# EAGLE board separation (EAGLE 9.6.2)
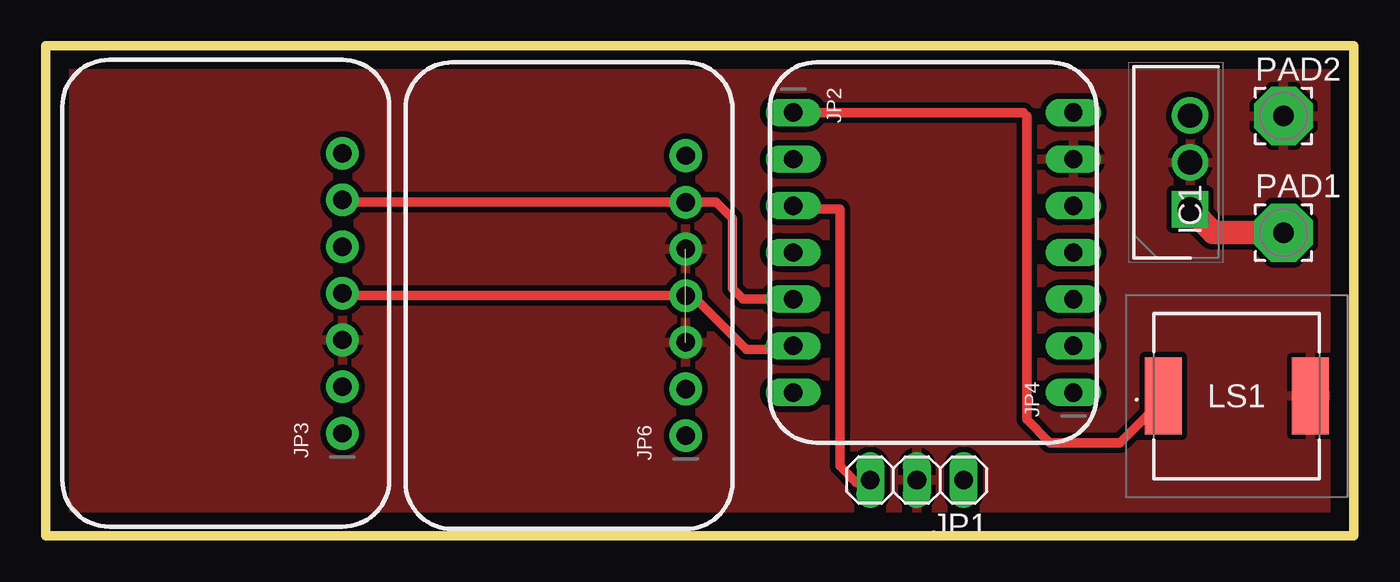
[diagram p0: board, top side]
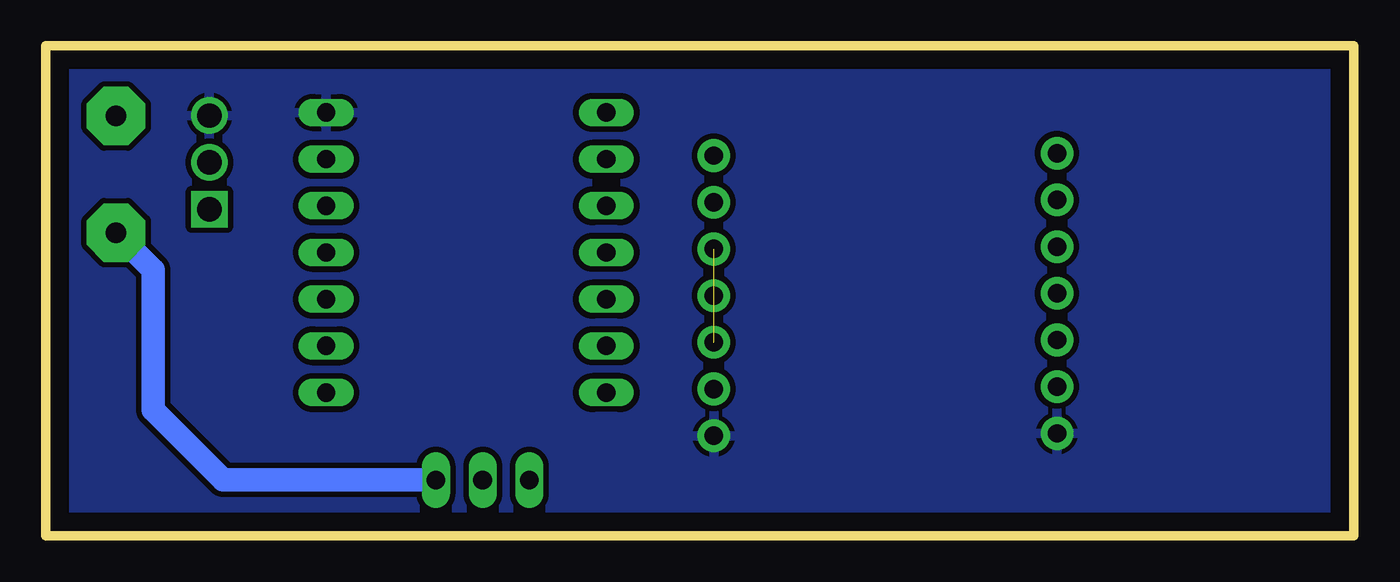
[diagram p1: board, bottom side, seen from below]

Size 71.12 x 26.67 mm. Coordinates in mm from the lower left corner, seen from the top.
Outline: 0,26.67 71.12,26.67 71.12,0 0,0 0,26.67
Copper layers (1*16): Top 0.035mm / dielectric 1.5mm / Bottom 0.035mm
Design rules "default": minimum track width 6mil, minimum drill 0.35mm, track to track 6mil, track to pad 6mil, pad to pad 6mil, via to via 6mil, smd to smd 6mil, copper to edge 40mil, drill to drill 6mil, minimum pad ring 10mil, minimum via ring 8mil, stop-mask expansion 4mil, vias tented up to drill 0mil, thermal gap 10mil
Net classes: 1 highpower: width 0.305 mm, drill 0.483 mm; 2 lowpower: width 0.305 mm, drill 0.483 mm

## Footprints (pad centres in the part's own frame; a part is rotated, then mirrored left to right if it is on the bottom)
TO255P460X1020X2008-3P = drill 1.32 pad 1.98 square: 1 0,0 | drill 1.32 pad 1.98: 2 2.55,0; 3 5.1,0
1X03 = drill 1.016 long: 1 -2.54,0; 2 0,0; 3 2.54,0
1X07_OVAL = drill 1 long: 1 -7.62,0; 2 -5.08,0; 3 -2.54,0; 4 0,0; 5 2.54,0; 6 5.08,0; 7 7.62,0
1X07_ROUND_70 = drill 1 pad 1.778: 1 -7.62,0; 2 -5.08,0; 3 -2.54,0; 4 0,0; 5 2.54,0; 6 5.08,0; 7 7.62,0
KMTG0902 = smd 2 x 4.2: 1 -4,0; 2 4,0
3,17/1,1 = drill 1.118 pad 3.175 octagon: 1 0,0

## Placement (x,y rotation side)
IC1  L7805ACV  [TO255P460X1020X2008-3P]  62.23,17.78 90 top
JP1  [1X03]  47.37,3.05 180 top
JP2  [1X07_OVAL]  40.64,15.43 270 top
JP3  [1X07_ROUND_70]  16.13,13.21 90 top
JP4  [1X07_OVAL]  55.88,15.43 90 top
JP6  [1X07_ROUND_70]  34.8,13.08 90 top
LS1  KMTG0902  [KMTG0902]  64.77,7.62 0 top
PAD1  WIREPAD3,17/1,1  [3,17/1,1]  67.31,16.51 0 top
PAD2  WIREPAD3,17/1,1  [3,17/1,1]  67.31,22.86 0 top

## Library data of the parts
IC1 = SamacSys_Parts; ALLIED_NUMBER: 70013701; DESCRIPTION: Linear voltage regulator,L7805ACV 5V 1A STMicroelectronics L7805ACV, Single Linear Voltage Regulator, 1A 5 V, 2%, 3-Pin TO-220; HEIGHT: 4.6mm; MANUFACTURER_NAME: STMicroelectronics; MANUFACTURER_PART_NUMBER: L7805ACV; RS_PART_NUMBER: 2988508P; RS_PRICE-STOCK: http://uk.rs-online.com/web/p/products/2988508P
JP1 = pinhead
JP2-JP4 JP6 = microbuilder
LS1 = SamacSys_Parts; DESCRIPTION: RS PRO 65 (Minimum)dB SMD Square Wave Piezo Buzzer; HEIGHT: 2.2mm; MANUFACTURER_NAME: RS Components; MANUFACTURER_PART_NUMBER: KMTG0902; RS_PART_NUMBER: 1812715; RS_PRICE-STOCK: https://uk.rs-online.com/web/p/products/1812715
PAD1 PAD2 = wirepad

## Nets
A1: JP2.2
A3: JP2.4
BUZZ: JP2.1 LS1.1
GND [highpower]: IC1.2 JP1.2 JP3.3 JP4.6 JP6.3 JP6.5 LS1.2 PAD2.1
MISO: JP4.3
MOSI: JP4.4
RX: JP4.1
SCK: JP4.2
SCL: JP2.6 JP3.4 JP6.4
SDA: JP2.5 JP3.6 JP6.6
SDO/ADR: JP3.5
SERVO: JP1.3 JP2.3
TX: JP2.7
VBAT: IC1.1 JP1.1 PAD1.1
VCC [highpower]: IC1.3 JP3.1 JP4.7 JP6.1

## Tracks (layer width: path | path; a pad name or v marks a point on that pad's centre or on a via)
BUZZ
  Top 0.508: JP2.1 42.99,23.05 53.15,23.05 53.34,22.86 53.34,6.35 54.61,5.08 58.42,5.08 60.77,7.43 LS1.1
GND  (1 unrouted)
  pour Top (isolate 0.305): -3.81,29.21 -3.81,-3.81 74.93,-3.81 74.93,29.21
SCL
  Top 0.508: JP2.6 40.45,10.16 38.1,10.16 35.18,13.08 JP6.4 16.26,13.08 JP3.4
SDA
  Top 0.508: JP2.5 37.91,12.89 37.34,13.46 37.34,17.27 36.45,18.16 JP6.6 16.26,18.16 JP3.6
SERVO
  Top 0.508: JP2.3 40.83,17.78 43.18,17.78 43.18,3.81 44.07,2.92 44.96,2.92 JP1.3
VBAT
  Top 1.27: PAD1.1 63.5,16.51 IC1.1
  Bottom 1.27: PAD1.1 65.28,14.48 65.28,6.86 61.47,3.05 JP1.1
VCC
  pour Bottom (isolate 0.305): -6.35,31.75 77.47,31.75 77.47,-6.35 -6.35,-6.35